# Altium PCB PCB_USB_DockingSTN.PcbDoc
Units mm, origin at the board's own origin, x right, y up, seen from the top; angles counter-clockwise.
Board outline 141.86 x 67.44 mm, 2 copper layers (Top Layer, Bottom Layer); 64 components, 108 nets, 433 pads, 0 vias.
Unrouted connection lines stored in the file: 1.
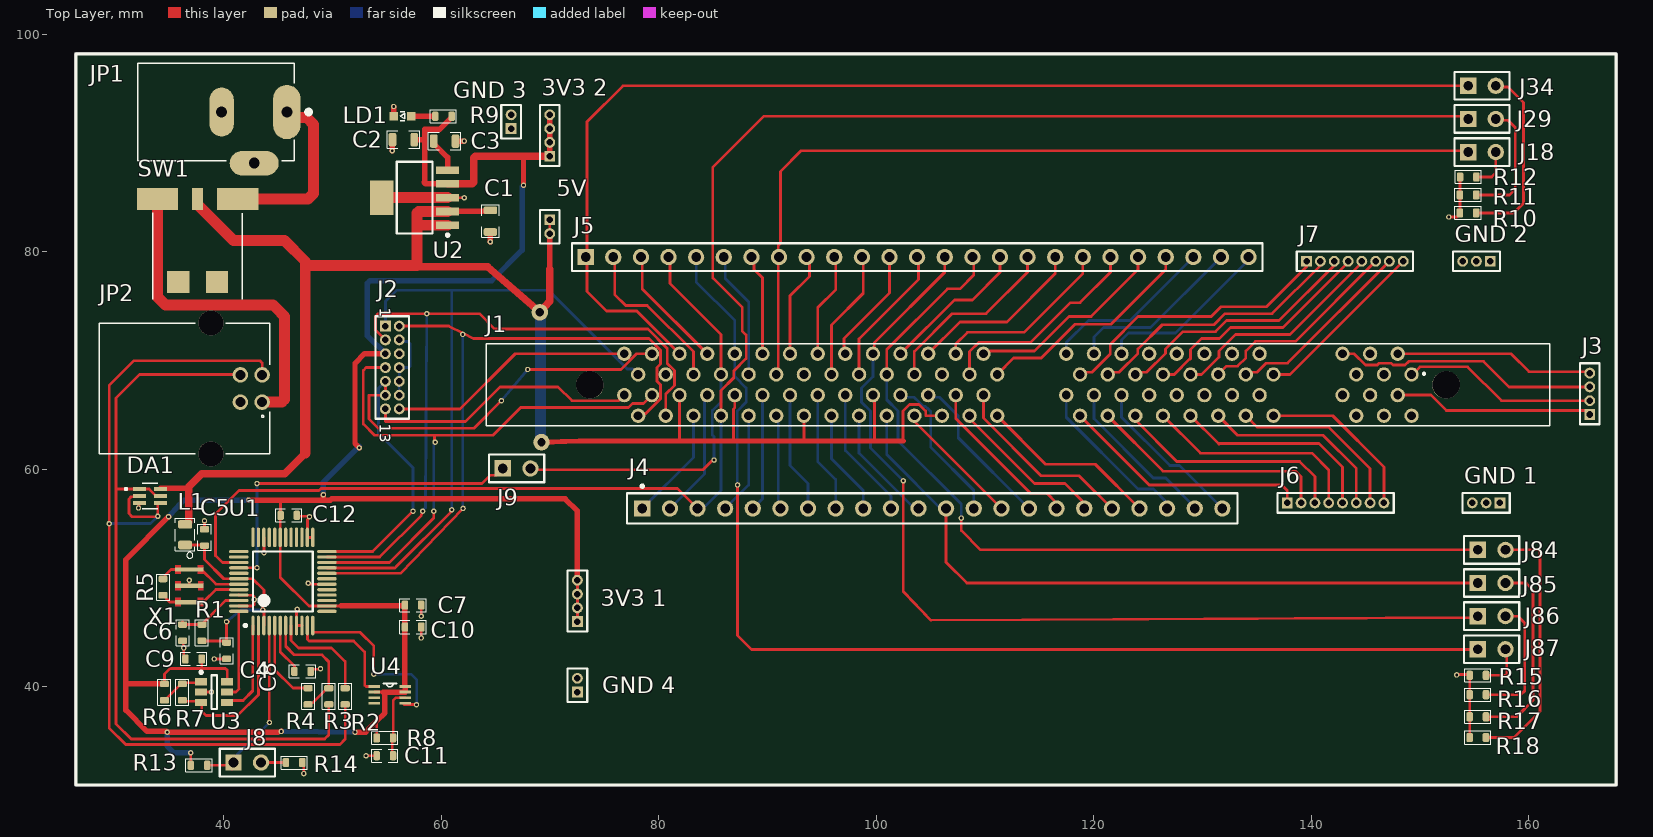
[diagram p0: Top Layer view]
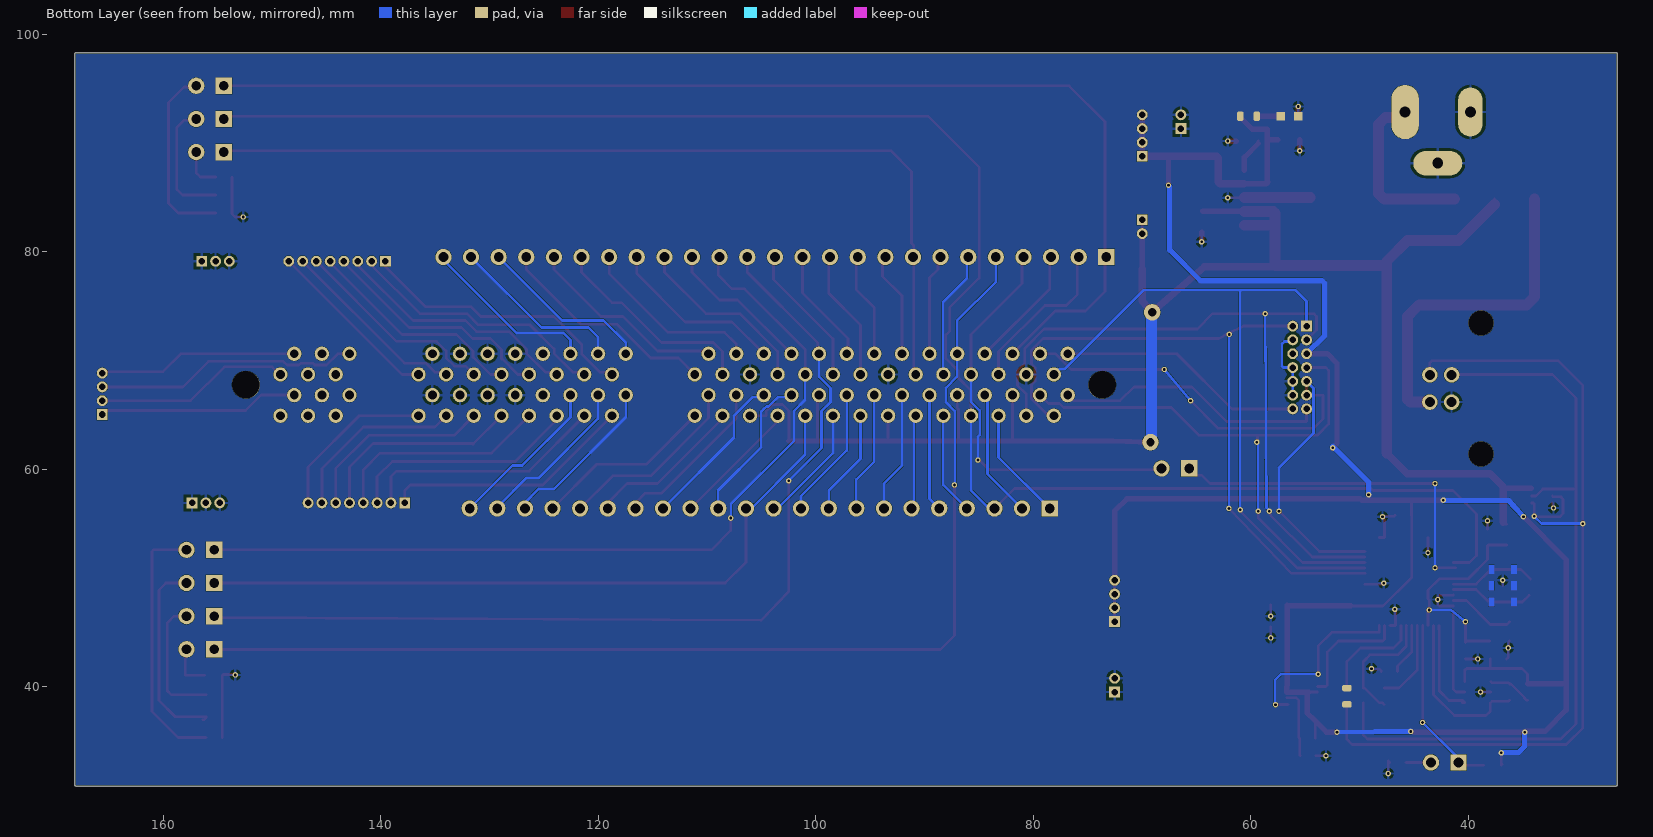
[diagram p1: Bottom Layer view, seen from below]

## Layer stack, top to bottom
Top Solder: solder mask 0.0102, Solder Resist, Dk 3.5
Top Layer: signal copper 0.0356
Dielectric 1: dielectric 0.32, FR-4, Dk 4.8
Bottom Layer: signal copper 0.0356
Bottom Solder: solder mask 0.0102, Solder Resist, Dk 3.5

## Board outline
26.289,30.988 26.289,98.17 cw(c26.416,98.171) 26.416,98.298 168.021,98.298 cw(c168.021,98.171) 168.148,98.171 168.148,30.988 cw(c168.021,30.988) 168.021,30.861 26.416,30.861 cw(c26.416,30.988)

## Design rules (kind name [scope] priority, off if disabled: settings)
Clearance [All] p1: gap=0.01 ignorepadtopadclearanceinfootprint=FALSE
PolygonConnect [All] p1: connectstyle=Relief reliefconductorwidth=0.254 reliefentries=4 polygonreliefangle="90 Angle" airgapwidth=0.254
RoutingVias [All] p1: holewidth=0.711 width=1.27 viastyle="Through Hole" minholewidth=0.711 minwidth=1.27 maxholewidth=0.711 maxwidth=1.27
SolderMaskExpansion [All] p1: expansion=0.102
Width [InNet('5V0')] p1: maxlimit=1.5 minlimit=0.254 preferedwidth=1 minimp=50.000000 maximp=50.000000 favimp=50.000000
30 further rules are at their usual default settings.

## Components (designator, comment, footprint, x,y, rotation, side; value= is the part's Value field where it differs from the comment)
"3V3 1" "MHDR1X4" MHDR1X4 72.517,45.974 r90 top
"3V3 2" "MHDR1X4" MHDR1X4 69.977,88.773 r90 top
5V "MHDR1X2" MHDR1X2 69.977,82.931 r270 top
C1 "10u" "C 0805(2012)x0.65" 64.516,82.804 r270 top
C2 "=Value" "C 0805(2012)x0.65" 56.515,90.297 r180 top
C3 "=Value" "C 0805(2012)x0.65" 60.309,90.17 r0 top
C4 "1u" "C 0603(1608)x0.8" 40.259,43.307 r90 top
C5 "1u" "C 0603(1608)x0.8" 38.227,53.721 r90 top
C6 "100n" "C 0603(1608)x0.8" 36.214,44.958 r90 top
C7 "100n" "C 0603(1608)x0.8" 57.404,47.498 r0 top
C8 "100n" "C 0603(1608)x0.8" 47.244,41.402 r180 top
C9 "100n" "C 0603(1608)x0.8" 37.223,42.545 r0 top
C10 "100n" "C 0603(1608)x0.8" 57.404,45.485 r180 top
C11 "100n" "C 0603(1608)x0.8" 54.815,33.655 r180 top
C12 "100n" "C 0603(1608)x0.8" 45.974,55.753 r0 top
DA1 "BAW567" BAW567 32.45,57.15 r0 top
"GND 1" "MHDR1X3" MHDR1X3 157.353,56.896 r180 top
"GND 2" "MHDR1X3" MHDR1X3 156.464,79.121 r180 top
"GND 3" "MHDR1X2" MHDR1X2 66.421,91.313 r90 top
"GND 4" "MHDR1X2" MHDR1X2 72.517,39.497 r90 top
J1 "5390213-1" *TE_5390213-1 113.03,67.757 r180 top
J2 "MHDR2X7" MHDR2X7 54.864,73.152 r270 top
J3 "SIL-HDR" MHDR1X4 165.608,65.024 r90 top
J4 "SIL-HDR" PIN22 78.486,56.388 r0 top
J5 "SIL-HDR" HDR1X25 73.279,79.502 r0 top
J6 "SIL-HDR" MHDR1X8 137.795,56.896 r0 top
J7 "SIL-HDR" MHDR1X8 139.573,79.121 r0 top
J8 "" PCBComponent_1 40.894,33.02 r0 top
J9 "J9" PCBComponent_1 65.659,60.071 r0 top
J18 "" PCBComponent_1 154.432,89.154 r0 top
J29 "" PCBComponent_1 154.432,92.202 r0 top
J34 "" PCBComponent_1 154.432,95.25 r0 top
J84 "" PCBComponent_1 155.321,52.578 r0 top
J85 "" PCBComponent_1 155.321,49.53 r0 top
J86 "" PCBComponent_1 155.321,46.482 r0 top
J87 "" PCBComponent_1 155.321,43.434 r0 top
JP1 "PJ-002BH" *CUI_PJ-002BH 45.799,92.838 r180 top
JP2 "292304-1" *TE_292304-1 38.819,67.417 r270 top
L1 "22uH" "L 0805(2012)" 36.449,53.975 r270 top
LD1 "WL-SMCW" *WL-SMCW_0603 56.429,92.456 r0 top
R1 "470" "R 0603(1608)"#1 37.992,44.958 r270 top
R2 "27R" "R 0603(1608)"#2 51.162,39.116 r270 top
R3 "27R" "R 0603(1608)"#1 49.657,39.116 r270 top
R4 "2k2" "R 0603(1608)"#1 47.752,39.116 r90 top
R5 "1M" "R 0603(1608)"#1 34.417,49.149 r270 top
R6 "2k2" "R 0603(1608)"#1 34.544,39.497 r90 top
R7 "10k" "R 0603(1608)"#1 36.195,39.497 r270 top
R8 "1k" "R 0603(1608)"#1 54.815,35.287 r180 top
R9 "470" "R 0603(1608)"#2 60.201,92.456 r0 top
R10 "2k7" "R 0603(1608)"#1 154.42,83.566 r0 top
R11 "2k7" "R 0603(1608)"#1 154.42,85.217 r0 top
R12 "2k7" "R 0603(1608)"#1 154.432,86.868 r0 top
R13 "47K" "R 0603(1608)"#1 37.719,32.766 r0 top
R14 "1K5" "R 0603(1608)"#1 46.47,33.02 r0 top
R15 "2k7" "R 0603(1608)"#1 155.321,41.04 r0 top
R16 "2k7" "R 0603(1608)"#1 155.321,39.262 r0 top
R17 "2k7" "R 0603(1608)"#1 155.321,37.23 r0 top
R18 "2k7" "R 0603(1608)"#1 155.321,35.325 r0 top
SW1 "400BWMSP1R2BLKSM6QE" *SW_400BWMSP1R2BLKSM6QE 37.592,84.836 r90 top
U1 "FT2232D" LQFP-48_N 45.438,49.671 r90 top
U2 "TPS79533DCQ" TI-DCQ6_N 57.554,84.963 r180 top
U3 "93LC46BT-E/OT" SOT-23-OT6_N 39.116,39.497 r0 top
U4 "SN74LVC2G74DCUT" *SOP50P310X90-8N 55.272,39.243 r0 top
X1 "" *OSC_CSTCR4M00G53-R0 36.83,49.276 r270 top

## Footprints (in the part's own frame and the unit in brackets; to place one, negate y for a bottom-side part, rotate by r counter-clockwise, add the part's x,y. Pads: shape width x height; smd on the part's side, far side on the other; paste and mask are expansions set on the pad)
*CUI_PJ-002BH [mm]
  oval 2.5x5 hole 1: 1(0,0)
  oval 2.25x4.5 hole 1: 2(6,0)
  oval 4.5x2.25 hole 1: 3(3,4.7)
  silkscreen extent -2.2,-4.5 13.7,4.5
*OSC_CSTCR4M00G53-R0 [mm]
  rect 0.4x2.6 smd: 1(-1.5,0) 2(0,0) 3(1.5,0)
  Multi-Layer region: -0.4,1.3 0.4,1.3 0.4,0.801 -0.4,0.801
  Multi-Layer region: -0.4,-0.8 0.4,-0.8 0.4,-1.301 -0.4,-1.301
  Multi-Layer region: 1.1,1.3 1.9,1.3 1.9,0.8 1.1,0.8
  Multi-Layer region: 1.101,-0.8 1.9,-0.8 1.9,-1.301 1.101,-1.301
  Multi-Layer region: -1.9,1.3 -1.1,1.3 -1.1,0.8 -1.9,0.8
  Multi-Layer region: -1.9,-0.8 -1.1,-0.8 -1.1,-1.3 -1.9,-1.3
  silkscreen extent -3.08,-0.23 -2.52,0.33
*SOP50P310X90-8N [mil]
  rect 42x10 smd: 1(-56,30) 2(-56,10) 3(-56,-10) 4(-56,-30) 5(56,-30) 6(56,-10) 7(56,10) 8(56,30)
  silkscreen extent -24,29 24,41
*SW_400BWMSP1R2BLKSM6QE [mm]
  rect 2.03x3.81 smd: 1(0,-3.685) 3(0,3.685)
  rect 2.03x1.02 smd: 2(0,0)
  rect 2.03x2.03 smd: P$1(-7.62,1.78) P$2(-7.62,-1.78)
  silkscreen extent -9.21,-4.13 -1.28,4.13
*TE_292304-1 [mm]
  round 1.428 hole 0.92: 1(1.25,4.71) 2(-1.25,4.71) 3(-1.25,2.71) 4(1.25,2.71)
  round 2.3 hole 2.3 unplated: None(-6.02,0) None_1(6.02,0)
  silkscreen extent -6.01,-10.28 6.01,5.43
*TE_5390213-1 [mm]
  round 1.318 hole 0.81: 1(-36.195,-0.95) 2(-34.925,-2.85) 3(-33.655,-0.95) 4(-32.385,-2.85) 5(-31.115,-0.95) 6(-29.845,-2.85) 7(-23.495,-0.95) 8(-22.225,-2.85) 9(-20.955,-0.95) 10(-19.685,-2.85) 11(-18.415,-0.95) 12(-17.145,-2.85) 13(-15.875,-0.95) 14(-14.605,-2.85) 15(-13.335,-0.95) 16(-12.065,-2.85) 17(-10.795,-0.95) 18(-9.525,-2.85) 19(-8.255,-0.95) 20(-6.985,-2.85) 21(-5.715,-0.95) 22(-4.445,-2.85) 23(1.905,-0.95) 24(3.175,-2.85) 25(4.445,-0.95) 26(5.715,-2.85) 27(6.985,-0.95) 28(8.255,-2.85) 29(9.525,-0.95) 30(10.795,-2.85) 31(12.065,-0.95) 32(13.335,-2.85) 33(14.605,-0.95) 34(15.875,-2.85) 35(17.145,-0.95) 36(18.415,-2.85) 37(19.685,-0.95) 38(20.955,-2.85) 39(22.225,-0.95) 40(23.495,-2.85) 41(24.765,-0.95) 42(26.035,-2.85) 43(27.305,-0.95) 44(28.575,-2.85) 45(29.845,-0.95) 46(31.115,-2.85) 47(32.385,-0.95) 48(33.655,-2.85) 49(34.925,-0.95) 50(36.195,-2.85) 51(-36.195,2.85) 52(-34.925,0.95) 53(-33.655,2.85) 54(-32.385,0.95) 55(-31.115,2.85) 56(-29.845,0.95) 57(-23.495,2.85) 58(-22.225,0.95) 59(-20.955,2.85) 60(-19.685,0.95) 61(-18.415,2.85) 62(-17.145,0.95) 63(-15.875,2.85) 64(-14.605,0.95) 65(-13.335,2.85) 66(-12.065,0.95) 67(-10.795,2.85) 68(-9.525,0.95) 69(-8.255,2.85) 70(-6.985,0.95) 71(-5.715,2.85) 72(-4.445,0.95) 73(1.905,2.85) 74(3.175,0.95) 75(4.445,2.85) 76(5.715,0.95) 77(6.985,2.85) 78(8.255,0.95) 79(9.525,2.85) 80(10.795,0.95) 81(12.065,2.85) 82(13.335,0.95) 83(14.605,2.85) 84(15.875,0.95) 85(17.145,2.85) 86(18.415,0.95) 87(19.685,2.85) 88(20.955,0.95) 89(22.225,2.85) 90(23.495,0.95) 91(24.765,2.85) 92(26.035,0.95) 93(27.305,2.85) 94(28.575,0.95) 95(29.845,2.85) 96(31.115,0.95) 97(32.385,2.85) 98(33.655,0.95) 99(34.925,2.85) 100(36.195,0.95)
  round 2.54 hole 2.54 unplated: None(39.37,0) None_1(-39.37,0)
  silkscreen extent -48.89,-3.77 48.89,3.77
*WL-SMCW_0603 [mm]
  rect 0.8x0.8 all layers, no hole: 1(-0.8,0) 2(0.8,0)
  silkscreen extent -0.2,-0.4 0.2,0.4
BAW567 [mm] "BAW567"
  rect 1.19x0.4 smd: 1(-0.198,1.031) 2(-0.198,0.381) 3(-0.198,-0.269) 4(1.722,-0.269) 5(1.722,0.381) 6(1.722,1.031)
  silkscreen extent -1.54,-0.79 1.46,1.55
"C 0603(1608)x0.8" [mm]
  rrect50% 0.6x0.85 smd: 1(-0.75,0) 2(0.75,0)
  silkscreen extent -1.2,-0.6 1.2,0.6, body extent -0.8,-0.4 0.8,0.4, height 0.81
"C 0805(2012)x0.65" [mm]
  rrect50% 0.7x1.25 smd: 1(-1,0) 2(1,0)
  silkscreen extent -1.5,-0.8 1.5,0.8, body extent -1,-0.62 1,0.63, height 0.66
HDR1X25 [mm] "Connector; Header; 25 Position"
  rect 1.5x1.5 hole 0.9: 1(0,0)
  round 1.5 hole 0.9: 2(2.54,0) 3(5.08,0) 4(7.62,0) 5(10.16,0) 6(12.7,0) 7(15.24,0) 8(17.78,0) 9(20.32,0) 10(22.86,0) 11(25.4,0) 12(27.94,0) 13(30.48,0) 14(33.02,0) 15(35.56,0) 16(38.1,0) 17(40.64,0) 18(43.18,0) 19(45.72,0) 20(48.26,0) 21(50.8,0) 22(53.34,0) 23(55.88,0) 24(58.42,0) 25(60.96,0)
  silkscreen extent -1.27,-1.27 62.23,1.27
"L 0805(2012)" [mm]
  rrect50% 0.8x1.3 smd: 1(-0.95,0) 2(0.95,0)
  silkscreen extent -1.5,-0.9 1.5,0.9, body extent -1.05,-0.9 1.05,0.9, height 1.45
LQFP-48_N [mm] "Thin QFP, 48-Leads, Body 7x7mm, Pitch 0.5mm, IPC Medium Density"
  oval 1.8x0.3 smd mask+0.05: 1(-4.05,2.75) 2(-4.05,2.25) 3(-4.05,1.75) 4(-4.05,1.25) 5(-4.05,0.75) 6(-4.05,0.25) 7(-4.05,-0.25) 8(-4.05,-0.75) 9(-4.05,-1.25) 10(-4.05,-1.75) 11(-4.05,-2.25) 12(-4.05,-2.75) 25(4.05,-2.75) 26(4.05,-2.25) 27(4.05,-1.75) 28(4.05,-1.25) 29(4.05,-0.75) 30(4.05,-0.25) 31(4.05,0.25) 32(4.05,0.75) 33(4.05,1.25)
  oval 0.3x1.8 smd mask+0.05: 13(-2.75,-4.05) 14(-2.25,-4.05) 15(-1.75,-4.05) 16(-1.25,-4.05) 17(-0.75,-4.05) 18(-0.25,-4.05) 19(0.25,-4.05) 20(0.75,-4.05) 21(1.25,-4.05) 22(1.75,-4.05) 23(2.25,-4.05) 24(2.75,-4.05) 39(1.75,4.05) 40(1.25,4.05) 41(0.75,4.05) 42(0.25,4.05) 43(-0.25,4.05) 44(-0.75,4.05) 45(-1.25,4.05) 46(-1.75,4.05) 47(-2.25,4.05) 48(-2.75,4.05)
  oval 1.8x0.3 smd paste+0 mask+0.05: 34(4.05,1.75) 35(4.05,2.25)
  oval 1.8x0.3 smd mask+0.102: 36(4.05,2.75)
  oval 0.3x1.8 smd: 37(2.75,4.05)
  oval 0.3x1.8 smd paste+0 mask+0.05: 38(2.25,4.05)
  silkscreen extent -4.17,-2.75 2.75,3.57, body extent -3.5,-3.5 3.5,3.5, height 1.6
MHDR1X2 [mm] "Connector; Header; 2 Position"
  rect 1x1 hole 0.6: 1(0,0)
  round 1 hole 0.6: 2(1.27,0)
  silkscreen extent -0.9,-0.9 2.17,0.9
MHDR1X3 [mm] "Connector; Header; 3 Position"
  rect 1x1 hole 0.6: 1(0,0)
  round 1 hole 0.6: 2(1.27,0) 3(2.54,0)
  silkscreen extent -0.9,-0.9 3.44,0.9
MHDR1X4 [mm] "Connector; Header; 4 Position"
  rect 1x1 hole 0.6: 1(0,0)
  round 1 hole 0.6: 2(1.27,0) 3(2.54,0) 4(3.81,0)
  silkscreen extent -0.9,-0.9 4.71,0.9
MHDR1X8 [mm] "Connector; Header; 8 Position"
  rect 1x1 hole 0.6: 1(0,0)
  round 1 hole 0.6: 2(1.27,0) 3(2.54,0) 4(3.81,0) 5(5.08,0) 6(6.35,0) 7(7.62,0) 8(8.89,0)
  silkscreen extent -0.9,-0.9 9.79,0.9
MHDR2X7 [mm] "Connector; Header; 7x2 Position"
  rect 1x1 hole 0.6: 1(0,0)
  round 1 hole 0.6: 2(0,1.27) 3(1.27,0) 4(1.27,1.27) 5(2.54,0) 6(2.54,1.27) 7(3.81,0) 8(3.81,1.27) 9(5.08,0) 10(5.08,1.27) 11(6.35,0) 12(6.35,1.27) 13(7.62,0) 14(7.62,1.27)
  silkscreen extent -0.9,-0.9 8.52,2.17
PCBComponent_1 [mm]
  rect 1.5x1.5 hole 0.9: 1(0,0)
  round 1.5 hole 0.9: 2(2.54,0)
  silkscreen extent -1.27,-1.27 3.81,1.27
PIN22 [mm] "Connector; Edge; 22 Position"
  rect 1.5x1.5 hole 0.9: 1(0,0)
  round 1.5 hole 0.9: 2(2.54,0) 3(5.08,0) 4(7.62,0) 5(10.16,0) 6(12.7,0) 7(15.24,0) 8(17.78,0) 10(22.86,0) 11(25.4,0) 12(27.94,0) 13(30.48,0) 14(33.02,0) 15(35.56,0) 16(38.1,0) 17(40.64,0) 18(43.18,0) 19(45.72,0) 20(48.26,0) 21(50.8,0) 22(53.34,0)
  oval 1.51x1.5 hole 0.9: 9(20.32,0)
  silkscreen extent -1.4,-1.4 54.74,2.17
"R 0603(1608)"#1 [mm]
  rrect50% 0.6x0.85 smd: 1(-0.75,0) 2(0.75,0)
  silkscreen extent -1.2,-0.6 1.2,0.6, body extent -0.8,-0.4 0.8,0.4, height 0.45
"R 0603(1608)"#2 [mm]
  rrect50% 0.6x0.85 all layers, no hole: 1(-0.75,0) 2(0.75,0)
  silkscreen extent -1.2,-0.6 1.2,0.6, body extent -0.8,-0.4 0.8,0.4, height 0.45
SOT-23-OT6_N [mm] "SOT23, 6-Leads, Body 2.9x1.6mm, Pitch 0.95mm, Lead Span 2.7mm, IPC Medium Density"
  rect 1.1x0.65 smd: 1(-1.2,0.95) 2(-1.2,0) 3(-1.2,-0.95) 4(1.2,-0.95) 5(1.2,0) 6(1.2,0.95)
  silkscreen extent -1.32,-1.55 0.25,1.95, body extent -0.9,-1.55 0.9,1.55, height 1.45
TI-DCQ6_N [mm] "SOT223, 6-Leads, Body 6.5x3.5mm, Pitch 1.27mm, IPC Medium Density"
  rect 2.15x0.7 smd: 1(-3.025,2.54) 2(-3.025,1.27) 3(-3.025,0) 4(-3.025,-1.27) 5(-3.025,-2.54)
  rect 2.15x3.2 smd: 6(3.025,0)
  silkscreen extent -3.15,-3.3 1.65,3.56, body extent -1.78,-3.27 1.78,3.27, height 1.8

## Part data
"3V3 1" "3V3 2": "Header, 4-Pin", LatestRevisionDate=17-Jul-2002, LatestRevisionNote="Re-released for DXP Platform.", Publisher="Altium Limited"
5V "GND 3" "GND 4": "Header, 2-Pin", LatestRevisionDate=17-Jul-2002, LatestRevisionNote="Re-released for DXP Platform.", Publisher="Altium Limited"
C1 C2 C3: library part "C 0805  100V X7R - 10n", "SMD-0805   100V X7R 10%", Manufacturer=Samsung, Package=0805, Package-mm=2012, Part Number=CL21B103KCNC, Supplier Part Number 1="C0805 10nF 100V X7R SAMSUNG", TempCo=X7R, Temperature Range="-55°C ~ +125°C", Tolerance %=±10%, ComponentLink1Description="Datasheet link", ComponentLink1URL=https://store.comet.bg/download-file.php?id=11, Mount Type=SMT, Price=0.031, Published=07.04.2019, Publisher=Hefest, RoHS=Y, Supplier 1=Comet, Technology="Ceramic  MLCC", TYPE=Capacitors, VDC=100V
  C2: 0n=4u7
  C3: 0n=100n
C4 C5 C6 C7 C8 C9 C10 C11 C12: library part "C 0603    16V X7R - 1u", "SMD-0603     16V X5R 10%", Manufacturer=Samsung, Package=0603, Package-mm=1608, Supplier Part Number 1="C0603 1.0uF 16V X7R SAMSUNG", TempCo=X7R, Temperature Range="-55°C ~ +125°C", Tolerance %=±10%, ComponentLink1Description="Datasheet link", ComponentLink1URL=https://store.comet.bg/download-file.php?id=11, Mount Type=SMT, Price=0.056, Published=07.04.2019, Publisher=Hefest, RoHS=Y, Supplier 1=Comet, Technology="Ceramic  MLCC", TYPE=Capacitors, VDC=16V
DA1: library part A1
"GND 1" "GND 2": "Header, 3-Pin", LatestRevisionDate=17-Jul-2002, LatestRevisionNote="Re-released for DXP Platform.", Publisher="Altium Limited"
J1: "D2P,100 POS,3.3V,NB DRAM,PB-FREE", Package=None, Availability=Unavailable, Centerline_Pitch="1.27 mm[.05 in]", EU_RoHS_Compliance=Compliant, MF="TE Connectivity", MP=5390213-1, Number_of_Positions=100, Price=None, Product_Type=Socket, SnapEDA_Link=https://www.snapeda.com/parts/5390213-1/TE%20Connectivity%20AMP%20Connectors/view-part/?ref=snap, TE_purchase_URL=https://www.te.com/usa-en/product-5390213-1.html?te_bu=Cor&te_type=disp&te_campaign=seda_glo_cor-seda-global-disp-prtnr-fy19-seda-model-bom-cta_sma-317_1&elqCampaignId=32493
J2: "Header, 7-Pin, Dual row", LatestRevisionDate=17-Jul-2002, LatestRevisionNote="Re-released for DXP Platform.", Publisher="Altium Limited"
J3: library part MHDR1X4, "Header, 4-Pin", LatestRevisionDate=17-Jul-2002, LatestRevisionNote="Re-released for DXP Platform.", Publisher="Altium Limited"
J4: library part "Edge Con 22", "22-Pin Edge Connector", LatestRevisionDate=17-Jul-2002, LatestRevisionNote="Re-released for DXP Platform.", Publisher="Altium Limited"
J5: library part "Header 25", "Header, 25-Pin", LatestRevisionDate=17-Jul-2002, LatestRevisionNote="Re-released for DXP Platform.", Publisher="Altium Limited"
J6 J7: library part MHDR1X8, "Header, 8-Pin", LatestRevisionDate=17-Jul-2002, LatestRevisionNote="Re-released for DXP Platform.", Publisher="Altium Limited"
J8 J9 J18 J29 J34 J84 J85 J86 J87: library part Component_1
JP1: "2.5 x 6.5 mm, 5.0 A, Horizontal, Through Hole, Dc Power Jack Connector", Package=None, CUI_purchase_URL=https://www.cuidevices.com/product/interconnect/connectors/dc-power-connectors/jacks/pj-002bh?utm_source=snapeda.com&utm_medium=referral&utm_campaign=snapedaBOM, Digi-Key_Part_Number=CP-002BH-ND, Digi-Key_Purchase_URL=https://www.digikey.com/product-detail/en/cui-devices/PJ-002BH/CP-002BH-ND/408447?utm_source=snapeda&utm_medium=aggregator&utm_campaign=symbol, MF="CUI Devices", MP=PJ-002BH, SnapEDA_Link=https://www.snapeda.com/parts/PJ-002BH/CUI%20Devices/view-part/?ref=snap
JP2: "USB - B USB 2.0 Receptacle Connector 4 Position Through Hole, Right Angle", Package=None, Availability=Unavailable, Centerline_Pitch="2.5 mm[.098 in]", EU_RoHS_Compliance=Compliant, MF="TE Connectivity", MP=292304-1, Number_of_Positions=4, Price=None, Product_Type=Connector, SnapEDA_Link=https://www.snapeda.com/parts/292304-1/TE%20Connectivity%20AMP%20Connectors/view-part/585812/?ref=snap, TE_purchase_URL=https://www.te.com/usa-en/product-292304-1.html?te_bu=Cor&te_type=disp&te_campaign=seda_glo_cor-seda-global-disp-prtnr-fy19-seda-model-bom-cta_sma-317_1&elqCampaignId=32493
L1: library part "L 0805 100n", "SMD 0805 Q-65 @150MHz", Manufacturer=COILS, Package=0805, Package-mm=2012, Part Number="CCFH0805 C R10J", Supplier Part Number 1="CL0805 100nH CCFH", Temperature Range="-55°C ~ +125°C", Tolerance %=±5%, Value1=0.46?, Value2=0.4A, ComponentLink1Description="Datasheet link", ComponentLink1URL=https://store.comet.bg/download-file.php?id=377, DCR=0.46?, Imax=0.4A, Ind=100n, Material=Ferrite, Mount Type=SMT, Price=0.169, Published=07.04.2019, Publisher=Hefest, Q@100MHz=65, RoHS=Y, S.R.F.=1200MHz, Supplier 1=Comet, Technology=Chip, TYPE=Inductors
LD1: "LED, 0805, B GREEN, 40MCD, 570NM; Bulb Size: -; LED Colour: Green; Luminous Intens", Package="0805 Würth Elektronik", Digi-Key_Part_Number=732-4986-1-ND, Digi-Key_Purchase_URL=https://www.digikey.com/product-detail/en/w-rth-elektronik/150080VS75000/732-4986-1-ND/4489922?utm_source=snapeda&utm_medium=aggregator&utm_campaign=symbol, MF="Wurth Electronics", MP=150080VS75000, SnapEDA_Link=https://www.snapeda.com/parts/150080VS75000/Wurth%20Electronics%20Inc./view-part/?ref=snap
R1 R2 R3 R4 R5 R6 R7 R8 R9 R10 R11 R12 R13 R14 R15 R16 R17 R18: library part "R 0603-5%", "SMD 0603 0.1W     5%   75V", Manufacturer=YAGEO, Package=0603, Package-mm=1608, Power=0.1W, Supplier Part Number 1="R0603 1.0K 5% YAG/ASJ", TempCo=±100ppm/°C, Temperature Range="-55°C ~ +155°C", Tolerance %=±5%, Value Code=102, ComponentLink1Description="Datasheet link", ComponentLink1URL=https://store.comet.bg/download-file.php?id=140, Mount Type=SMT, Price=0.016, Published=07.04.2019, Publisher=Hefest, RoHS=Y, Supplier 1=Comet, Technology="Thick film", TYPE=Resistor, VDC=75V
SW1: "400B Series 3 A SPDT On-None-On Surface Mount Sub-Miniature Rocker Switch", Package=None, Availability=Unavailable, MF=E-Switch, MP=400BWMSP1R2BLKSM6QE, Price=None, SnapEDA_Link=https://www.snapeda.com/parts/400BWMSP1R2BLKSM6QE/E-Switch/view-part/?ref=snap
U1: "FT2232D Dual USB to Serial UART/FIFO IC, -40 to +85 degC, 48-pin LQFP", Manufacturer=FTDI, ComponentLink1Description="Manufacturer URL", ComponentLink1URL=http://www.ftdichip.com/, ComponentLink2Description=Datasheet, ComponentLink2URL=http://www.ftdichip.com/Support/Documents/DataSheets/ICs/DS_FT2232D.pdf, DatasheetVersion="ver 2.05, Apr-2011", PackageDescription="48-Pin Thin Quad Flat Pack, 7 x 7 mm Body, 0.5 mm Pitch", PackageReference=LQFP-48, PackageVersion=Apr-11, PartNumber=FT2232D
U2: "Single Output High PSRR LDO, 500 mA, Fixed 3.3 V Output, 2.7 to 5.5 V Input, 6-pin SOT-223 (DCQ), Green (RoHS & no Sb/Br)", Manufacturer="Texas Instruments", Rating=Catalog, Supplier Part Number 1=296-27106-5-ND, Accuracy(%)=2, ComponentLink1Description="Manufacturer URL", ComponentLink1URL=http://www.ti.com/, ComponentLink2Description=Datasheet, ComponentLink2URL=http://www.ti.com/general/docs/lit/getliterature.tsp?genericPartNumber=TPS79533&fileType=pdf, ComponentLink3Description="Package Specification", ComponentLink3URL=http://www.ti.com/litv/pdf/mpds098c, DatasheetVersion=SLVS350H, Eco-Plan="Green (RoHS & no Sb/Br)", Fixed Output Options(V)=3.3, Iout(Max)(A)=0.5, Iq(Typ)(mA)=0.26, Mounting Technology="Surface Mount", PackageDescription="6-Pin Plastic Small Outline, Body 3.5 x 6.5 mm, Pitch 1.27 mm", PackageReference=DCQ6, PackageVersion=4202109/D, PartNumber=TPS79533DCQ, SubFamily="Single Channel LDO", Supplier 1=Digi-Key, Supplier 2=Farnell, Supplier 3=Newark, Supplier 4=Mouser, Supplier Part Number 2=1702824, Supplier Part Number 3=72K9601, Supplier Part Number 4=595-TPS79533DCQ, Vdo(Typ)(mV)=105, Vin(Max)(V)=5.5, Vin(Min)(V)=2.7, Vout Adj(Max)(V)=3.3, Vout Adj(Min)(V)=3.3
U3: "1K, 64x16-bit, 2.5V Microwire Serial EEPROM, 6-Pin SOT-23, Extended Temperature, Tape and Reel", Manufacturer=Microchip, Supplier Part Number 1=93LC46BT-E/OT-ND, Code_IPC=SOT26A-6, ComponentLink1Description="Manufacturer URL", ComponentLink1URL=http://www.microchip.com/, ComponentLink2Description=Datasheet, ComponentLink2URL=http://ww1.microchip.com/downloads/en/DeviceDoc/21749G.pdf, ComponentLink3Description="Package Specification", ComponentLink3URL=http://www.microchip.com/stellent/groups/techpub_sg/documents/packagingspec/en012702.pdf, DatasheetVersion="revG, May-2008", Mounting Technology="Surface Mount", PackageDescription="6-Lead Plastic Small Outline Transistor (OT) [SOT-23]", PackageReference=SOT-23-OT6, PackageVersion="revBB, Aug-2009", PartNumber=93LC46BT-E/OT, Supplier 1=Digi-Key, Supplier 2=Mouser, Supplier Part Number 2=579-93LC46BT-E/OT
U4: "Single Positive-Edge-Triggered D-Type Flip-Flop with Clear and Preset 8-VSSOP -40 to 125", Package="VFSOP-8 Texas Instruments", Digi-Key_Part_Number=296-26623-1-ND, Digi-Key_Purchase_URL=https://www.digikey.com/product-detail/en/texas-instruments/SN74LVC2G74DCUT/296-26623-1-ND/2255081?utm_source=snapeda&utm_medium=aggregator&utm_campaign=symbol, MF="Texas Instruments", MP=SN74LVC2G74DCUT, SnapEDA_Link=https://www.snapeda.com/parts/SN74LVC2G74DCUT/Texas%20Instruments/view-part/?ref=snap
X1: library part CSTCR4M00G53-R0, "Ceramic Resonator 4MHz ??0.5% _Tol_ ??0.2% _Stability_ 15pF 60Ohm 3-Pin CSMD T/R", Package="SMD-3 Murata", Availability=Unavailable, MF=Murata, MP=CSTCR4M00G53-R0, Price=None, SnapEDA_Link=https://www.snapeda.com/parts/CSTCR4M00G53-R0/Murata%20Electronics%20North%20America/view-part/?ref=snap

## Free pads (board coordinates)
  round 0.5 hole 0.25 mask+0.102: 3(29.464,54.991) 3(32.156,56.428) 3(33.934,55.666) 3(34.798,35.814) 3(34.925,55.626) 3(36.322,43.561) 3(36.83,49.784) 3(36.957,33.909) 3(38.227,55.245) 3(38.866,39.497) 3(39.116,42.545) 3(40.259,45.974) 3(42.291,57.15) 3(42.799,48.006) 3(43.053,50.927) 3(43.053,58.674) 3(43.591,47.048) 3(43.7,52.312) 3(44.196,36.703) 3(45.276,35.877) 3(46.748,47.105) 3(47.359,32.004) 3(47.764,49.518) 3(47.879,55.626) 3(48.895,41.656) 3(49.161,57.646) 3(52.07,35.814) 3(52.463,61.964) 3(53.086,33.636) 3(53.799,41.148) 3(55.499,89.281) 3(55.626,93.345) 3(57.404,56.134) 3(57.723,38.342) 3(58.154,44.481) 3(58.166,46.482) 3(58.293,56.134) 3(58.674,74.295) 3(59.309,56.134) 3(59.436,62.484) 3(60.96,56.261) 3(61.976,72.39) 3(62.006,56.388) 3(62.103,90.17) 3(62.115,84.951) 3(64.516,80.899) 3(65.532,66.294) 3(67.564,86.106) 3(67.945,69.164) 3(85.09,60.833) 3(87.249,58.547) 3(102.489,58.928) 3(107.823,55.499) 3(152.654,83.185) 3(153.376,41.08)
  round 1.524 hole 0.762: 4(69.215,62.484) 5(69.066,74.425)

## Nets (pads, with @x,y where several pads share a name; then routed paths per layer and width w, separated by ;. In a path a pad name is that pad's centre, name@x,y a point inside that pad or via, vN(x,y) a via of type N, cw(c..) or ccw(c..) an arc to the next point about the centre after c; other vN are vias at no path point)
3V3: "3V3 1.1" "3V3 1.2" "3V3 1.3" "3V3 1.4" "3V3 2.1" "3V3 2.2" "3V3 2.3" "3V3 2.4" C2.1 C7.1 C9.2 C10.2 C12.1 J2.5 pad.3@34.798,35.814 pad.3@34.925,55.626 pad.3@36.957,33.909 pad.3@42.291,57.15 pad.3@45.276,35.877 pad.3@49.161,57.646 pad.3@52.07,35.814 pad.3@52.463,61.964 pad.3@67.564,86.106 R6.2 R8.2 R9.2 R13.1 U1.14 U1.31 U2.4 U3.6 U4.2 U4.7 U4.8 | length 221.2
  Top Layer w0.254: R6.2 34.544,41.148 35.052,41.656 37.973,41.656 ; pad.3@36.957,33.909 36.963,33.903 36.963,32.944 36.877,32.858 R13.1 ; C9.2 37.973,41.656 ; U3.6 40.316,41.507 40.167,41.656 37.973,41.656 ; 45.212,57.15 45.224,57.138 C12.1 45.197,55.726 45.197,53.73 U1.31 45.188,50.062 47.829,47.421 U1.14 50.791,47.421 50.8,47.43 ; 46.482,57.15 46.506,57.126 ; 49.784,57.15 49.911,57.277 ; U4.2 54.666,39.497 54.815,39.348 ; R8.2 54.065,36.842 ; C7.1@56.586,47.43 C7.1 ; C10.2@56.642,45.578 C10.2@56.654,45.59 ; U4.8 U4.8@56.72,40.005 ; R9.2@60.951,92.331 R9.2 ; 62.992,88.624 63.141,88.773 ; 67.448,88.773 67.564,88.657 ; 72.517,45.974 72.517,47.244 72.517,48.514 72.517,49.784
  Top Layer w0.5: 31.877,40.247 31.865,40.247 31.874,40.256 ; R6.2 31.874,40.256 ; pad.3@34.925,55.626 30.988,51.689 30.988,37.846 32.956,35.877 34.734,35.877 34.798,35.814 44.958,35.814 pad.3@45.276,35.877 ; pad.3@42.291,57.15 45.212,57.15 46.482,57.15 49.149,57.15 ; pad.3@49.149,57.658 49.149,57.15 ; 49.784,57.15 49.149,57.15 ; 49.911,57.277 71.4,57.277 72.517,56.16 72.517,49.784 ; 50.791,47.43 50.8,47.43 C7.1@56.586,47.43 ; pad.3@52.07,35.814 53.037,35.814 54.065,36.842 54.815,37.592 54.815,39.348 ; pad.3@52.463,61.964 52.07,62.357 52.07,69.723 52.959,70.612 J2.5 ; 54.666,39.497 U4.7 U4.8 ; U4.8@56.642,40.107 C10.2@56.642,45.578 ; C10.2@56.654,45.59 C7.1 ; C2.1 58.494,90.297 ; 58.42,86.382 58.569,86.233 U2.4 ; 58.494,86.307 58.494,90.297 ; R9.2@60.951,92.331 59.88,91.26 58.494,91.26 58.494,90.297 ; 62.843,86.233 62.992,86.382 ; pad.3@67.564,86.106 67.564,88.657 ; 69.977,88.773 69.977,90.043 69.977,91.313 69.977,92.583 ; 31.874,40.256 31.877,40.259 31.115,40.259 31.874,40.256
  Top Layer w0.7: U2.4 62.843,86.233 ; 62.992,86.382 62.992,88.624 ; 63.141,88.773 67.448,88.773 69.977,88.773
  Bottom Layer w0.5: pad.3@34.798,35.814 34.798,34.544 35.433,33.909 pad.3@36.957,33.909 ; pad.3@34.925,55.626 36.322,57.15 pad.3@42.291,57.15 ; pad.3@45.276,35.877 pad.3@52.07,35.814 ; pad.3@49.161,57.646 49.161,58.813 pad.3@52.451,62.103 ; J2.5 53.213,72.263 53.213,77.089 53.467,77.343 64.643,77.343 67.437,80.137 pad.3@67.437,85.979
5V0: 5V.1 5V.2 C1.1 DA1.6 J1.77 J1.82 J1.87 J1.92 J1.96 L1.1 pad.4 pad.5 SW1.2 U2.1 U2.2 | length 162.2
  Top Layer w0.254: DA1.6 DA1.6@34.218,58.227 ; L1.1 36.555,54.925 L1.1@36.772,55.142 ; 36.711,56.195 36.772,56.134 ; SW1.2@37.592,84.331 SW1.2 ; 57.785,82.296 57.912,82.423 ; 57.785,83.544 57.934,83.693 ; U2.2 U2.2@60.61,83.724 ; C1.1@64.435,83.724 C1.1 ; 5V.2 5V.1 ; 81.915,62.589 J1.96 ; 86.868,62.589 86.868,65.532 86.995,65.659 J1.92 ; 93.218,62.589 93.345,62.716 J1.87 ; J1.82 99.841,66.661 99.841,62.757 99.822,62.738 99.822,62.589 ; 102.489,62.589 102.465,62.613 102.465,65.338 103.074,65.947 103.936,65.947 104.545,65.338 104.545,64.907 J1.77
  Top Layer w0.5: DA1.6@34.218,58.227 36.711,58.227 ; U2.2@60.61,83.724 C1.1@64.435,83.724 ; pad.4 72.666,62.589 81.915,62.589 86.868,62.589 93.218,62.589 99.822,62.589 102.489,62.589 ; 69.977,78.359 69.977,80.264 ; 69.977,80.391 5V.2
  Top Layer w0.7: L1.1@36.772,55.142 36.772,56.134 36.772,58.377 37.958,59.563 45.593,59.563 47.498,61.468 ; 57.785,78.613 64.262,78.613 pad.5 69.977,75.438 69.977,78.359
  Top Layer w1: SW1.2@37.592,84.331 40.897,81.026 45.593,81.026 47.498,79.121 47.498,78.74 57.785,78.74 57.785,82.296 ; 47.498,61.468 47.498,78.486 ; 57.785,82.423 57.785,83.544 ; 57.912,82.423 U2.1 ; 57.934,83.693 U2.2
  Bottom Layer w1: pad.5 69.141,74.35 69.141,62.558 pad.4
5V-USB: JP2.1 SW1.3 | length 31.2
  Top Layer w0.254: 45.339,66.167 45.593,66.421
  Top Layer w1: SW1.3 33.907,75.821 34.631,75.097 44.537,75.097 44.831,74.803 45.593,74.041 45.593,66.421 ; JP2.1 45.339,66.167
ADC-A0: J1.57 J6.8 | length 15.4
  Top Layer w0.254: J1.57 141.976,64.907 146.685,60.198 J6.8
ADC-A1: J1.59 J6.7 | length 16.6
  Top Layer w0.254: J1.59 135.011,63.881 141.605,63.881 145.415,60.071 J6.7
ADC-A2: J1.61 J6.6 | length 17.9
  Top Layer w0.254: J1.61 133.233,63.119 141.097,63.119 144.145,60.071 J6.6
ADC-A3: J1.63 J6.5 | length 19.3
  Top Layer w0.254: J1.63 131.513,62.298 131.572,62.357 140.716,62.357 142.875,60.198 J6.5
ADC-A4: J1.65 J6.4 | length 20.3
  Top Layer w0.254: J1.65 129.804,61.468 140.081,61.468 141.605,59.944 J6.4
ADC-A5: J1.67 J6.3 | length 21.5
  Top Layer w0.254: J1.67 123.825,64.516 127.635,60.706 138.938,60.706 140.335,59.309 J6.3
ADC-A6: J1.69 J6.2 | length 22.5
  Top Layer w0.254: J1.69 126.375,59.817 138.557,59.817 139.065,59.309 J6.2
ADC-A7: J1.71 J6.1 | length 23
  Top Layer w0.254: J1.71 125.105,58.547 137.287,58.547 137.795,58.039 J6.1
ADC-B0: J1.7 J7.8 | length 16.2
  Top Layer w0.254: J1.7 138.049,68.707 148.336,78.994 J7.8@148.365,79.141
ADC-B1: J1.9 J7.7 | length 17.5
  Top Layer w0.254: J1.9 134.184,68.906 135.025,68.906 135.866,69.747 137.819,69.747 J7.7
ADC-B2: J1.11 J7.6 | length 19.2
  Top Layer w0.254: J1.11 132.207,69.469 133.223,69.469 133.985,70.231 133.985,70.866 134.874,71.755 138.557,71.755 J7.6
ADC-B3: J1.13 J7.5 | length 20.5
  Top Layer w0.254: J1.13 129.921,68.707 131.508,70.294 131.508,70.871 133.027,72.39 138.049,72.39 144.653,78.994 J7.5
ADC-B4: J1.15 J7.4 | length 21.9
  Top Layer w0.254: J1.15 127.405,68.707 128.824,70.126 128.905,70.126 128.905,70.993 129.921,72.009 131.572,72.009 132.588,73.025 137.414,73.025 143.383,78.994 J7.4
ADC-B5: J1.17 J7.3 | length 23.1
  Top Layer w0.254: J1.17 124.024,68.906 124.865,68.906 126.595,70.636 126.595,71.038 128.201,72.644 131.191,72.644 132.207,73.66 137.033,73.66 142.113,78.74 J7.3
ADC-B6: J1.19 J7.2 | length 24.3
  Top Layer w0.254: J1.19 121.484,68.906 122.325,68.906 124.055,70.636 124.055,71.038 126.296,73.279 131.064,73.279 132.08,74.295 136.398,74.295 140.843,78.74 J7.2
ADC-B7: J1.21 J7.1 | length 26
  Top Layer w0.254: J1.21 118.944,68.906 119.833,68.906 121.515,70.588 121.515,71.477 124.079,74.041 130.81,74.041 131.699,74.93 135.89,74.93 139.573,78.613 J7.1
EMU0: J1.100 J2.13 | length 25.2
  Top Layer w0.254: J2.13 54.864,64.389 62.23,64.389 65.405,67.564 70.739,67.564 72.009,66.294 76.322,66.294 J1.100
EMU1: J1.50 J2.14 | length 22.9
  Top Layer w0.254: J2.14 61.722,65.532 66.802,70.612 76.83,70.612 J1.50 J1.50@76.76,70.532
GND: "GND 1.1" "GND 1.2" "GND 1.3" "GND 2.1" "GND 2.2" "GND 2.3" "GND 3.1" "GND 3.2" "GND 4.1" "GND 4.2" C1.2 C2.2 C3.2 C4.1 C5.2 C6.1 C7.2 C8.1 C9.1 C10.1 C11.2 C12.2 DA1.3 J1.8 J1.10 J1.12 J1.14 J1.27 J1.37 J1.47 J1.58 J1.60 J1.62 J1.64 J2.4 J2.8 J2.10 J2.12 JP1.2 JP1.3 JP2.4 LD1.1 pad.3@32.156,56.428 pad.3@36.83,49.784 pad.3@36.322,43.561 pad.3@38.227,55.245 pad.3@38.866,39.497 pad.3@39.116,42.545 pad.3@42.799,48.006 pad.3@43.7,52.312 pad.3@46.748,47.105 pad.3@47.359,32.004 pad.3@47.764,49.518 pad.3@47.879,55.626 pad.3@48.895,41.656 pad.3@53.086,33.636 pad.3@55.499,89.281 pad.3@55.626,93.345 pad.3@58.154,44.481 pad.3@58.166,46.482 pad.3@62.103,90.17 pad.3@62.115,84.951 pad.3@64.516,80.899 pad.3@152.654,83.185 pad.3@153.376,41.08 R10.1 R11.1 R12.1 R14.2 R15.1 R16.1 R17.1 R18.1 U1.9 U1.10 U1.18 U1.25 U1.26 U1.34 U1.45 U1.47 U2.3 U2.6 U3.2 U4.4 X1.2 | length 53
  Top Layer w0.254: pad.3@32.196,56.388 32.196,56.825 DA1.3 ; C6.1 36.275,44.147 36.275,43.608 36.322,43.561 36.322,42.696 C9.1 ; X1.2 pad.3@36.83,49.784 ; U3.2 pad.3@38.866,39.497 ; C5.2 pad.3@38.227,55.245 ; pad.3@39.116,42.545 39.122,42.551 40.253,42.551 C4.1 ; U1.47 42.65,47.421 42.799,47.57 42.799,48.006 42.799,48.26 42.647,48.412 41.397,48.412 U1.45 ; pad.3@43.688,52.324 U1.34 ; C12.2 46.804,55.673 47.832,55.673 47.879,55.626 47.879,55.559 47.688,55.368 U1.26 U1.25 ; pad.3@46.736,47.117 46.688,47.069 U1.9 U1.10 ; R14.2 47.359,33.159 pad.3@47.359,32.004 ; pad.3@47.752,49.53 47.861,49.421 U1.18 ; C8.1 47.994,41.438 48.165,41.609 48.848,41.609 pad.3@48.895,41.656 ; pad.3@53.086,33.636 C11.2@53.987,33.636 ; C2.2@55.499,90.281 C2.2 ; pad.3@55.626,93.345 pad.3@55.629,93.342 ; pad.3@58.154,44.481 C10.1 ; C7.2 58.154,46.494 pad.3@58.166,46.482 ; U2.3 pad.3@62.103,84.963 ; pad.3@152.654,83.185 153.402,83.185 153.67,83.453 R10.1 R11.1 153.676,85.223 153.676,86.862 R12.1 ; pad.3@153.376,41.08 153.59,41.12 154.491,41.12 R15.1 R16.1 R17.1 R18.1
  Top Layer w0.5: pad.3@55.499,89.281 C2.2@55.499,90.281 ; LD1.1 pad.3@55.629,93.342 ; C3.2 pad.3@62.103,90.17 ; pad.3@64.516,80.899 C1.2
  Top Layer w1: U2.6 U2.3
  Bottom Layer w0.254: J2.12 J2.10 J2.8 57.015,69.342 57.15,69.477 57.15,71.501 56.912,71.739 56.277,71.739 J2.4
GND-ISO: J1.6 J3.3 | length 24.4
  Top Layer w0.254: J1.6 143.944,70.607 144.984,69.567 146.074,69.567 146.254,69.747 147.344,69.747 147.524,69.567 148.614,69.567 148.963,69.916 155.84,69.916 158.192,67.564 J3.3
GPIO-00: J1.23 J5.22 | length 20.6
  Top Layer w0.254: J1.23 112.629,70.211 115.169,70.211 118.283,73.325 121.585,73.325 126.619,78.359 J5.22
GPIO-01: J1.73 J4.19 | length 16.9
  Top Layer w0.254: J1.73 115.58,60.452 120.142,60.452 J4.19 J4.19@124.46,56.388
GPIO-02: J1.24 J5.21 | length 18.6
  Top Layer w0.254: J1.24 110.114,70.866 114.554,70.866 117.729,74.041 119.761,74.041 124.079,78.359 J5.21
GPIO-03: J1.74 J4.18 | length 17.4
  Top Layer w0.254: J1.74 109.855,64.706 115.166,59.395 118.659,59.395 J4.18
GPIO-04: J1.25 J5.20 | length 19.5
  Top Layer w0.254: J1.25 108.585,70.808 109.424,71.647 114.192,71.647 117.856,75.311 118.745,75.311 121.539,78.105 J5.20
GPIO-05: J1.75 J4.17 | length 14.5
  Top Layer w0.254: J1.75 108.585,64.643 114.554,58.674 117.348,58.674 119.126,56.896 J4.17
GPIO-06: J1.26 J5.19 | length 16.8
  Top Layer w0.254: J1.26 107.315,71.501 108.394,72.581 113.602,72.581 118.999,77.978 J5.19
GPIO-07: J1.76 J4.16 | length 15.2
  Top Layer w0.254: J1.76 107.315,64.643 114.173,57.785 115.697,57.785 116.586,56.896 J4.16
GPIO-08: J1.28 J5.18 | length 16.3
  Top Layer w0.254: J1.28 107.699,73.531 112.012,73.531 116.459,77.978 J5.18
GPIO-09: J1.78 J4.15 | length 14.8
  Bottom Layer w0.254: J1.78 104.974,66.608 105.815,66.608 107.545,64.878 107.545,62.889 J4.15
GPIO-10: J1.29 J5.17 | length 16.9
  Top Layer w0.254: J1.29 103.505,70.808 106.992,74.295 110.109,74.295 113.919,78.105 J5.17
GPIO-11: J1.79 J4.14 | length 11.8
  Top Layer w0.254: J1.79 103.505,64.389 J4.14
GPIO-12: J1.33 J5.13 | length 13.1
  Top Layer w0.254: J1.33 98.425,71.984 103.886,77.445 J5.13@103.886,79.502
GPIO-13: J1.83 J4.11 | length 11.2
  Bottom Layer w0.254: J1.83 98.425,61.468 J4.11@103.886,56.007
GPIO-14: J1.84 J4.10 | length 12.2
  Bottom Layer w0.254: J1.84 97.155,61.722 101.346,57.531 J4.10
GPIO-15: J1.34 J5.12 | length 10.7
  Top Layer w0.254: J1.34 97.028,70.734 97.028,72.009 101.219,76.2 J5.12
GPIO-16: J1.38 J5.9 | length 10
  Top Layer w0.254: J1.38 92.075,75.946 93.853,77.724 J5.9@93.853,79.883
GPIO-17: J1.88 J4.7 | length 11.1
  Bottom Layer w0.254: J1.88 92.075,60.325 93.726,58.674 J4.7
GPIO-18: J1.39 J5.8 J18.1 | length 82.9
  Top Layer w0.254: J1.39 90.995,68.897 90.995,80.581 91.186,80.772 91.186,87.376 93.091,89.281 J18.1@154.432,89.281
GPIO-19: J1.89 J4.6 | length 8.6
  Bottom Layer w0.254: J1.89 90.995,64.716 J4.6@90.995,56.388
GPIO-20: J1.40 J5.7 | length 9.3
  Top Layer w0.254: J5.7 88.757,79.264 88.757,78.375 89.535,77.597 J1.40
GPIO-21: J1.90 J4.5 | length 10.8
  Bottom Layer w0.254: J4.5 89.535,57.277 J1.90
GPIO-22: J1.41 J5.6 | length 12.1
  Top Layer w0.254: J1.41 J1.41@88.285,68.727
  Bottom Layer w0.254: J5.6@86.106,79.883 86.106,77.555 88.265,75.396 J1.41
GPIO-23: J1.91 J4.4 | length 9.4
  Bottom Layer w0.254: J4.4 88.265,58.547 J1.91
GPIO-24: J1.35 J5.11 | length 12.4
  Top Layer w0.254: J1.35 95.885,73.254 98.806,76.175 J5.11@98.806,79.883
GPIO-25: J1.85 J4.9 | length 9.7
  Bottom Layer w0.254: J1.85 95.885,60.96 98.806,58.039 J4.9
GPIO-26: J1.36 J5.10 | length 10
  Top Layer w0.254: J1.36 94.615,74.839 96.266,76.49 J5.10@96.266,79.883
GPIO-27: J1.86 J4.8 | length 11.1
  Bottom Layer w0.254: J1.86 94.615,60.706 96.266,59.055 J4.8
GPIO-28: J1.43 J5.4 J9.2 pad.3@85.09,60.833 | length 38.9
  Top Layer w0.254: J9.2@68.199,60.579 68.834,59.944 84.074,59.944 84.921,60.791 pad.3@85.132,60.791 ; J5.4@81.026,79.883 81.026,77.064 85.725,72.365 J1.43
  Bottom Layer w0.254: pad.3@85.09,60.833 85.09,62.988 84.929,63.149 84.929,65.386 85.725,66.182 J1.43
GPIO-29: J1.93 J4.3 J29.1 U1.39 | length 159.2
  Top Layer w0.254: U1.39 39.878,51.421 39.878,51.407 39.243,52.042 39.243,55.88 41.402,58.039 48.768,58.039 48.959,58.23 81.724,58.23 J4.3 ; J1.93 85.725,67.236 86.894,68.405 86.894,69.035 88.035,70.176 88.035,72.351 87.668,72.718 87.668,74.892 84.975,77.585 84.975,87.769 89.662,92.456 J29.1@154.432,92.456 ; J29.1@153.924,91.694 J29.1
  Bottom Layer w0.254: J4.3 84.074,56.388 85.725,58.039 J1.93
GPIO-30: J1.44 J5.3 | length 11.7
  Top Layer w0.254: J5.3@78.486,79.883 78.486,76.576 J1.44
GPIO-31: J1.94 J4.2 | length 11.8
  Bottom Layer w0.254: J4.2 84.201,59.563 84.201,66.553 J1.94
GPIO-32: J1.45 J5.2 | length 15.3
  Top Layer w0.254: J5.2@75.946,79.883 75.946,76.073 76.962,75.057 78.936,75.057 83.185,70.808 J1.45
GPIO-33: J1.95 J4.1 | length 10.5
  Bottom Layer w0.254: J4.1 83.185,61.087 J1.95
GPIO-34: J1.46 J5.1 J34.1 | length 108.9
  Top Layer w0.254: J1.46 77.973,74.549 75.184,74.549 73.406,76.327 73.406,91.948 76.708,95.25 J34.1
GPIO-48: J1.30 J5.16 | length 13.6
  Top Layer w0.254: J1.30 107.193,75.565 108.839,75.565 111.379,78.105 J5.16
GPIO-49: J1.80 J4.13 | length 13.9
  Bottom Layer w0.254: J1.80 102.434,66.608 103.487,66.608 103.92,66.175 103.936,66.175 104.344,65.767 104.54,65.767 104.785,65.522 105.005,65.302 105.005,62.02 108.966,58.059 J4.13
GPIO-58: J1.18 J5.25 | length 15.7
  Bottom Layer w0.254: J1.18 122.555,71.882 123.19,72.517 127.508,72.517 133.858,78.867 J5.25@133.858,79.121
GPIO-59: J1.68 J4.22 | length 14.8
  Bottom Layer w0.254: J1.68 122.555,64.77 127,60.325 127.889,60.325 J4.22
GPIO-60: J1.20 J5.24 | length 15.7
  Bottom Layer w0.254: J1.20 120.015,72.136 120.904,73.025 125.222,73.025 J5.24@131.318,79.121
GPIO-61: J1.70 J4.21 | length 15
  Bottom Layer w0.254: J1.70 120.015,64.643 125.476,59.182 126.619,59.182 129.095,56.706 J4.21@129.095,56.197
GPIO-62: J1.22 J5.23 | length 16
  Bottom Layer w0.254: J1.22 117.475,71.628 119.507,73.66 123.317,73.66 J5.23
GPIO-63: J1.72 J4.20 | length 15.1
  Bottom Layer w0.254: J1.72 117.475,64.77 124.079,58.166 125.486,58.166 126.746,56.906 J4.20
GPIO-84: J1.31 J5.15 J84.1 pad.3@107.823,55.499 | length 80.5
  Top Layer w0.254: J1.31 100.965,70.993 106.553,76.581 107.696,76.581 108.966,77.851 108.966,79.375 J5.15 ; pad.3@107.823,55.499 107.823,54.356 109.601,52.578 J84.1 J84.1@155.575,52.578
  Bottom Layer w0.254: J1.31 100.965,66.378 102.005,65.338 102.005,62.587 107.823,56.769 pad.3@107.823,55.499
GPIO-85: J1.81 J4.12 J85.1 | length 65.9
  Top Layer w0.254: J4.12 106.426,51.435 108.331,49.53 J85.1
  Bottom Layer w0.254: J1.81 100.965,61.344 J4.12@106.426,55.883
GPIO-86: J1.32 J5.14 J86.1 pad.3@102.489,58.928 | length 89.5
  Top Layer w0.254: J1.32 99.822,70.734 99.822,71.628 106.299,78.105 J5.14 ; pad.3@102.489,58.928 102.489,48.768 105.029,46.101 155.194,46.355 J86.1
  Bottom Layer w0.254: J1.32 99.695,68.506 98.655,67.466 98.655,66.148 99.465,65.338 99.465,61.952 pad.3@102.489,58.928
GPIO-87: J1.42 J5.5 J87.1 pad.3@87.249,58.547 | length 105.7
  Top Layer w0.254: pad.3@87.249,58.547 87.249,44.704 88.531,43.422 155.309,43.422 J87.1
  Bottom Layer w0.254: J5.5 83.439,77.216 86.995,73.66 J1.42 86.995,68.506 88.035,67.466 88.035,66.148 87.225,65.338 87.225,58.571 pad.3@87.249,58.547
NetC3_1: C3.1 U2.5 | length 3.3
  Top Layer w0.254: C3.1@59.309,89.945 C3.1 C3.1@59.359,90.12
  Top Layer w0.5: C3.1@59.309,89.945 60.579,88.675 U2.5
NetC4_2: C4.2 C5.1 L1.2 pad.3@40.259,45.974 pad.3@43.591,47.048 R1.2 U1.3 U1.42 | length 21.2
  Top Layer w0.254: L1.2 36.451,53.023 38.175,53.023 C5.1 38.227,51.689 39.995,49.921 U1.42 41.395,49.914 42.669,49.914 43.688,48.895 43.688,48.054 43.591,47.956 pad.3@43.591,47.048 ; R1.2 40.108,44.208 C4.2 40.259,45.974 pad.3@40.446,45.974 ; U1.3 43.688,47.048 pad.3@43.688,47.117
  Bottom Layer w0.254: pad.3@40.259,45.974 41.587,47.048 pad.3@43.591,47.048
NetC6_2: C6.2 R1.1 U1.46 | length 6.2
  Top Layer w0.254: C6.2@36.195,45.962 36.437,45.72 37.973,45.72 40.165,47.912 41.379,47.912 U1.46
NetC8_2: C8.2 U1.6 | length 4.8
  Top Layer w0.254: U1.6 45.188,43.204 46.494,41.898 C8.2
NetC11_1: C11.1 R8.1 U4.6 | length 6.4
  Top Layer w0.254: C11.1@55.438,33.636 55.502,33.7 55.502,35.224 R8.1 55.577,35.299 55.577,38.735 55.831,38.989 U4.6
NetDA1_1: DA1.1 DA1.5 JP2.3 R3.2 | length 69.9
  Top Layer w0.254: 30.114,56.149 30.099,56.134 ; 30.114,58.181 DA1.1 32.267,58.166 33.142,58.166 33.777,57.531 DA1.5 ; JP2.3 41.489,68.707 32.258,68.707 30.099,66.548 30.099,56.134 ; R3.2@49.657,38.493 R3.2 49.657,35.56 49.276,35.179 31.496,35.179 30.099,36.576 30.099,56.134
NetDA1_2: DA1.2 DA1.4 JP2.2 pad.3@29.464,54.991 pad.3@33.934,55.666 R2.2 | length 84.8
  Top Layer w0.254: DA1.2 32.183,57.462 31.492,57.462 31.276,57.246 31.276,55.911 31.561,55.626 33.894,55.626 33.934,55.666 33.934,56.808 34.007,56.881 DA1.4 ; JP2.2 43.529,69.755 43.307,69.977 31.75,69.977 29.464,67.691 29.464,54.991 29.464,36.195 30.988,34.671 50.673,34.671 51.162,35.16 R2.2
  Bottom Layer w0.254: pad.3@29.464,54.991 33.259,54.991 pad.3@33.934,55.666
NetJ8_1: J8.1 pad.3@44.196,36.703 R13.2 U1.4 | length 15.8
  Top Layer w0.254: R13.2@38.596,32.766 40.64,32.766 J8.1 ; J8.1@40.767,32.385 J8.1@40.894,32.512 ; U1.4 44.188,36.711 pad.3@44.196,36.703
  Bottom Layer w0.254: J8.1@41.148,33.655 pad.3@44.196,36.703
NetJ8_2: J8.2 R14.1 | length 2.3
  Top Layer w0.254: J8.2@43.422,33.02 R14.1
NetJ9_1: J9.1 pad.3@43.053,50.927 pad.3@43.053,58.674 U1.40 | length 32.9
  Top Layer w0.254: U1.40@41.171,50.926 43.084,50.926 pad.3@43.053,50.927 ; pad.3@43.053,58.674 63.754,58.674 64.528,59.448 65.036,59.448 J9.1
  Bottom Layer w0.254: pad.3@43.053,50.927 pad.3@43.053,58.674
NetJ18_2: J18.2 R12.2 | length 3.9
  Top Layer w0.254: R12.2 156.591,86.868 156.972,87.249 J18.2
NetJ29_2: J29.2 R11.2 | length 11.6
  Top Layer w0.254: R11.2 158.242,85.217 158.75,85.725 158.75,91.44 158.103,92.087 157.087,92.087 J29.2
NetJ34_2: J34.2 R10.2 | length 17.2
  Top Layer w0.254: R10.2 158.623,83.566 159.512,84.455 159.512,93.726 158.103,95.135 157.087,95.135 J34.2
NetJ84_2: J84.2 R18.2 | length 23.9
  Top Layer w0.254: R18.2 158.642,35.325 161.036,37.719 161.036,52.429 160.887,52.578 J84.2
NetJ85_2: J85.2 R17.2 | length 18.4
  Top Layer w0.254: R17.2@156.355,36.946 156.242,36.946 156.071,37.117 R17.2 158.896,37.23 160.401,38.735 160.401,48.895 159.766,49.53 J85.2
NetJ86_2: J86.2 R16.2 | length 12
  Top Layer w0.254: R16.2 159.277,39.262 159.639,39.624 159.639,45.847 159.004,46.482 J86.2
NetJ87_2: J87.2 R15.2 | length 4.2
  Top Layer w0.254: R15.2@156.21,41.04 157.988,41.04 157.988,43.307 J87.2
NetJP1_1: JP1.1 SW1.1 | length 16.5
  Top Layer w1: SW1.1 47.752,84.836 48.26,85.344 48.26,88.773 48.26,91.694 47.625,92.329 46.434,92.329 JP1.1@45.799,92.964
NetLD1_2: LD1.2 R9.1 | length 2.2
  Top Layer w0.5: LD1.2 R9.1
NetR2_1: R2.1 U1.8 | length 9.6
  Top Layer w0.254: U1.8 46.188,44.236 46.863,43.561 49.911,43.561 51.162,42.31 R2.1
NetR3_1: R3.1 R4.1 U1.7 | length 11.3
  Top Layer w0.254: U1.7 45.697,45.612 45.697,43.711 46.482,42.926 49.022,42.926 49.657,42.291 R3.1@49.657,39.993 ; R4.1 47.911,38.525 48.191,38.525 49.532,39.866 R3.1
NetR4_2: R4.2 U1.5 | length 7.8
  Top Layer w0.254: U1.5 44.688,41.545 46.367,39.866 R4.2
NetR5_1: R5.1 U1.43 X1.1 | length 8
  Top Layer w0.254: R5.1@34.278,49.899 35.155,50.776 37.93,50.776 39.285,49.421 U1.43
NetR5_2: R5.2 U1.44 X1.3 | length 7.7
  Top Layer w0.254: R5.2@34.405,48.399 35.028,47.776 X1.3 37.93,47.776 38.003,47.849 38.197,47.849 39.269,48.921 U1.44
NetR6_1: R6.1 R7.1 U3.1 | length 4.1
  Top Layer w0.254: R6.1 34.657,38.747 34.828,38.918 34.828,39.005 36.07,40.247 R7.1 36.295,40.347 37.816,40.347 U3.1
NetR7_2: R7.2 U1.2 U3.3 | length 15.2
  Top Layer w0.254: R7.2 36.295,38.647 37.816,38.647 U3.3 37.973,38.49 37.973,37.719 38.354,37.338 41.275,37.338 43.188,39.251 U1.2
NetU1_1: U1.1 U3.4 | length 9
  Top Layer w0.254: U3.4@40.541,38.547 U3.4 40.504,38.735 41.783,38.735 42.667,39.619 42.667,45.212 42.688,45.233 U1.1
NetU1_11: U1.11 U4.1 | length 11
  Top Layer w0.254: U1.11 47.688,44.345 47.837,44.196 51.943,44.196 52.959,43.18 52.959,40.132 53.086,40.005 U4.1
NetU1_12: pad.3@53.799,41.148 pad.3@57.723,38.342 U1.12 U4.5 | length 16.9
  Top Layer w0.254: U1.12 48.188,45.019 48.209,44.998 52.538,44.998 53.799,43.737 pad.3@53.799,41.148 ; U4.5@56.568,38.354 57.711,38.354 pad.3@57.723,38.342
  Bottom Layer w0.254: pad.3@53.799,41.148 57.228,41.148 57.736,40.64 57.736,38.355 pad.3@57.723,38.342
NetU1_48: U1.48 U3.5 | length 8.3
  Top Layer w0.254: U3.5 41.116,39.497 41.402,39.783 41.388,39.797 U1.48
RX: J1.2 J3.4 | length 18.4
  Top Layer w0.254: J1.2 158.374,70.607 160.02,68.961 165.481,68.961 J3.4
TCK: J1.48 J2.9 J2.11 pad.3@57.404,56.134 pad.3@65.532,66.294 pad.3@67.945,69.164 U1.24 | length 57.3
  Top Layer w0.254: U1.24 53.691,52.421 pad.3@57.404,56.134 ; J2.9 J2.11 53.362,66.802 53.362,64.621 54.229,63.754 62.992,63.754 pad.3@65.532,66.294 ; pad.3@67.945,69.164 76.518,69.164 77.961,70.607 J1.48
  Bottom Layer w0.254: J2.9 54.227,67.435 54.227,63.305 57.404,60.128 pad.3@57.404,56.134 ; pad.3@65.532,66.294 pad.3@67.945,69.164
TDI: J1.97 J2.3 pad.3@58.293,56.134 pad.3@58.674,74.295 U1.23 | length 66.5
  Top Layer w0.254: U1.23 54.334,51.921 58.166,55.753 pad.3@58.293,56.134 ; J2.3 53.964,72.782 53.964,74.052 54.207,74.295 58.674,74.295 63.5,74.295 64.897,72.898 78.994,72.898 80.772,71.12 80.772,69.742 81.441,69.073 81.441,67.694 80.645,66.898 J1.97
  Bottom Layer w0.254: pad.3@58.293,56.134 58.293,56.201 58.547,56.455 pad.3@58.674,74.295
TDO: J1.98 J2.7 pad.3@59.309,56.134 pad.3@59.436,62.484 U1.22 | length 54.8
  Top Layer w0.254: U1.22 55.231,51.421 59.309,55.499 pad.3@59.309,56.134 ; J2.7 53.086,69.342 52.832,69.088 52.832,64.135 53.848,63.119 59.309,63.119 ; pad.3@59.436,62.484 59.389,62.531 59.389,63.039 59.309,63.119 ; J1.98 78.608,66.04 77.597,66.04 77.216,65.659 67.31,65.659 64.77,63.119 59.309,63.119
  Bottom Layer w0.254: pad.3@59.309,56.134 59.309,62.357 pad.3@59.436,62.484
TMS: J1.49 J2.1 pad.3@60.96,56.261 U1.21 | length 63.1
  Top Layer w0.254: U1.21 55.731,50.921 55.88,51.07 pad.3@61.016,56.205
  Bottom Layer w0.254: J2.1 54.864,75.438 55.88,76.454 60.96,76.454 ; pad.3@60.96,56.261 60.96,76.454 ; J1.49 77.597,69.215 77.101,69.215 69.862,76.454 60.96,76.454
TRSTn: J1.99 J2.2 pad.3@61.976,72.39 pad.3@62.006,56.388 U1.20 | length 63.5
  Top Layer w0.254: U1.20 56.263,50.421 pad.3@62.006,56.388 ; J2.2 60.706,73.152 62.027,72.492 62.992,72.009 79.099,72.009 80.171,70.937 80.171,69.68 79.849,69.358 79.849,68.079 80.171,67.757 80.171,66.477 78.804,65.111 78.309,65.111 J1.99
  Bottom Layer w0.254: pad.3@61.976,72.39 61.976,56.537 62.015,56.537 62.163,56.388 pad.3@62.006,56.388
TX: J1.52 J3.1 | length 18.4
  Top Layer w0.254: J1.52 151.015,66.807 152.425,65.397 165.235,65.397 J3.1
V33-ISO: J1.1 J3.2 | length 18
  Top Layer w0.254: J1.1 149.294,68.707 149.995,69.408 154.366,69.408 157.48,66.294 J3.2
pads on no net: J1.3 J1.4 J1.5 J1.16 J1.51 J1.53 J1.54 J1.55 J1.56 J1.66 J1.None J1.None_1 J2.6 JP2.None JP2.None_1 SW1.P$1 SW1.P$2 U1.13 U1.15 U1.16 U1.17 U1.19 U1.27 U1.28 U1.29 U1.30 U1.32 U1.33 U1.35 U1.36 U1.37 U1.38 U1.41 U4.3

## Polygon pours and split planes (outlines as drawn)
GND on Bottom Layer "GND_L02_P026" (solid, pour order 26): 26.416,98.171 26.416,30.988 168.021,30.988 168.021,98.171
no net on Bottom Layer "NONET_L02_P020" (solid, pour order 20): 25.273,97.155
no net on Bottom Layer "NONET_L02_P018" (solid, pour order 18): 26.416,101.727
no net on Bottom Layer "NONET_L02_P016" (solid, pour order 16): 26.416,101.727
no net on Bottom Layer "NONET_L02_P014" (solid, pour order 14): 26.416,101.727
no net on Bottom Layer "NONET_L02_P010" (solid, pour order 10): 25.908,101.473
GND on Bottom Layer "GND_L02_P006" (solid, pour order 6): 29.21,103.124
GND on Bottom Layer "GND_L02_P004" (solid, pour order 4): 25.019,106.426

## Silkscreen, mask and mechanical layers (free items; w line width, h text height)
Top Overlay:
  lines w0.254: 26.416,30.988 168.021,30.988 168.021,48.673 168.021,80.486 168.021,98.171 26.416,98.171 26.416,30.988

## Text inside footprints (layer, text, board x,y; h text height)
J2: Top Overlay "13" at 54.356,64.152 h1 r270; Top Overlay "1" at 54.356,74.852 h1 r270